# EAGLE board Amazing Lappi-Gaaris (EAGLE 9.7.0)

Size 184.33 x 102.52 mm. Coordinates in mm from the lower left corner, seen from the top.
Outline: 0,0 184.33,0 184.33,102.52 0,102.52 0,0
Copper layers (1*16): Top 0.035mm / dielectric 1.5mm / Bottom 0.035mm
Design rules "default": minimum track width 6mil, minimum drill 0.35mm, track to track 6mil, track to pad 6mil, pad to pad 6mil, via to via 6mil, smd to smd 6mil, copper to edge 40mil, drill to drill 6mil, minimum pad ring 10mil, minimum via ring 8mil, stop-mask expansion 4mil, vias tented up to drill 0mil, thermal gap 10mil

## Footprints (pad centres in the part's own frame; a part is rotated, then mirrored left to right if it is on the bottom)
BATTERY-GENERIC = drill 1.118 pad 3.15 octagon: + 2.54,0; - -2.54,0
SWITCH-SPDT-PTH-8.5X3.7MM = drill 1.016 pad 1.88: 1 -2.54,0; 2 0,0; 3 2.54,0
DIP762W53P254L1969H508Q14B = drill 0.743 pad 1.343: 1 -3.81,7.62; 2 -3.81,5.08; 3 -3.81,2.54; 4 -3.81,0; 5 -3.81,-2.54; 6 -3.81,-5.08; 7 -3.81,-7.62; 8 3.81,-7.62; 9 3.81,-5.08; 10 3.81,-2.54; 11 3.81,0; 12 3.81,2.54; 13 3.81,5.08; 14 3.81,7.62

## Placement (x,y rotation side)
FUNC1  FUNCTION-GENERATOR  [BATTERY-GENERIC]  8.26,52.77 180 top
FUNC2  FUNCTION-GENERATOR  [BATTERY-GENERIC]  10.8,8.26 180 top
P1  BATTERYGENERIC  [BATTERY-GENERIC]  24.15,94.27 180 top
S1  TOGGLE  [SWITCH-SPDT-PTH-8.5X3.7MM]  88.13,61.16 0 top
U1  74HC04_PDIP  [DIP762W53P254L1969H508Q14B]  110.99,54.81 90 top
U2  74HC08_PDIP  [DIP762W53P254L1969H508Q14B]  138.93,54.81 90 top
U3  74HC32_PDIP  [DIP762W53P254L1969H508Q14B]  169.41,54.81 90 top

## Library data of the parts
FUNC1 FUNC2 P1 S1 U1-U3 = Tinkercad

## Nets
FUNC1+: FUNC1.+ U2.2
P1+: P1.+ S1.3 U1.14 U2.14 U3.14
P1-: FUNC1.- FUNC2.- P1.- S1.1 U1.7 U2.7 U3.7
U1_6A: S1.2 U1.13 U2.13
U1_6Y: U1.12 U2.1
U2_1Y: U2.3 U3.2
U2_4Y: U2.11 U3.1

## Tracks (layer width: path | path; a pad name or v marks a point on that pad's centre or on a via)
FUNC1+  (1 unrouted)
P1+  (4 unrouted)
P1-  (6 unrouted)
U1_6A  (2 unrouted)
U1_6Y  (1 unrouted)
U2_1Y  (1 unrouted)
U2_4Y  (1 unrouted)